# Altium PCB SignalBufferBoard.PcbDoc
Units mil, origin at the board's own origin, x right, y up, seen from the top; angles counter-clockwise.
Board outline 890 x 520 mil, 2 copper layers (Top Layer, Bottom Layer); 19 components, 26 nets, 80 pads, 10 vias.
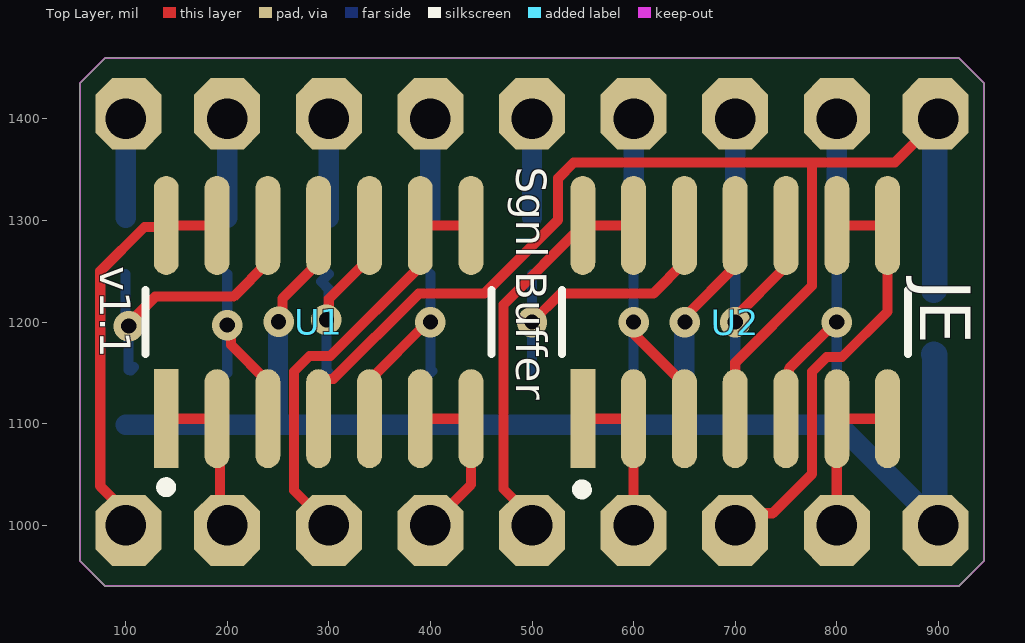
[diagram p0: Top Layer view]
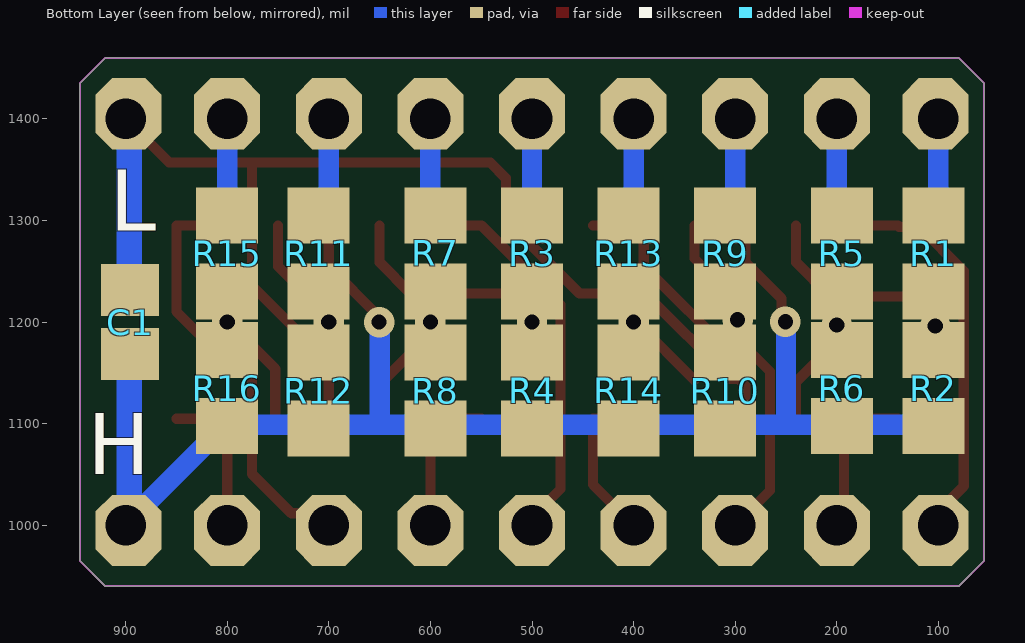
[diagram p1: Bottom Layer view, seen from below]

## Layer stack, top to bottom
Top Solder: solder mask 0.4, Solder Resist, Dk 3.5
Top Layer: signal copper 1.4
Dielectric 1: dielectric 12.6, FR-4, Dk 4.8
Bottom Layer: signal copper 1.4
Bottom Solder: solder mask 0.4, Solder Resist, Dk 3.5

## Board outline
945,965 920,940 80,940 55,965 55,1435 80,1460 920,1460 945,1435

## Design rules (kind name [scope] priority, off if disabled: settings)
BoardOutlineClearance [All] p1: gap=15 ignorepadtopadclearanceinfootprint=FALSE
Clearance [All] p1: gap=10 ignorepadtopadclearanceinfootprint=FALSE except(0: Arc-Hole Track-Hole SMDPad-Hole THPad-Hole Via-Hole Fill-Hole Poly-Hole Region-Hole Text-Hole; 7: Arc-SMDPad Track-SMDPad; 8: Arc-Arc Arc-Track Arc-THPad Arc-Via Arc-Fill Arc-Poly Arc-Region Arc-Text Track-Track Track-THPad Track-Via Track-Fill Track-Poly Track-Region Track-Text)
HoleSize [All] p1: absolutevalues=TRUE maxlimit=100 minlimit=10 maxpercent=80.000 minpercent=20.000
PolygonConnect [All] p1: connectstyle=Relief reliefconductorwidth=10 reliefentries=4 polygonreliefangle="90 Angle" airgapwidth=10
RoomDefinition SignalBufferBoard [InComponentClass('SignalBufferBoard')] p1: confinementstyle=ConfineIn formatcopy=TRUE lockcomponents=FALSE outline 50,1425 75,1450 925,1450 950,1425 950,975 925,950 75,950 50,975
RoutingVias [All] p1: holewidth=15 width=30 viastyle="Through Hole" minholewidth=12 minwidth=25 maxholewidth=28 maxwidth=50
SolderMaskExpansion [All] p1: expansion=4 istentingtop=FALSE
Width [All] p1: maxlimit=100 minlimit=8 preferedwidth=10 minimp=50.000000 maximp=50.000000 favimp=50.000000
29 further rules are at their usual default settings.

## Components (designator, comment, footprint, x,y, rotation, side; value= is the part's Value field where it differs from the comment)
C1 "C0805C105K4PACTU" CAPC2013X145X50NL20T25 895.5,1199.89 r90 bottom
R1 "ERA6AEB104V" RESC2013X60X40ML20T25 105,1267.4 r90 bottom
R2 "ERA6AEB204V" RESC2013X60X40ML20T25 105,1135 r90 bottom
R3 "ERA6AEB104V" RESC2013X60X40ML20T25 500,1267.6 r90 bottom
R4 "ERA6AEB204V" RESC2013X60X40ML20T25 500,1132.6 r90 bottom
R5 "ERA6AEB104V" RESC2013X60X40ML20T25 195,1267.4 r90 bottom
R6 "ERA6AEB204V" RESC2013X60X40ML20T25 195,1135 r90 bottom
R7 "ERA6AEB104V" RESC2013X60X40ML20T25 595,1267.6 r90 bottom
R8 "ERA6AEB204V" RESC2013X60X40ML20T25 595,1132.6 r90 bottom
R9 "ERA6AEB104V" RESC2013X60X40ML20T25 310,1267.6 r90 bottom
R10 "ERA6AEB204V" RESC2013X60X40ML20T25 310,1132.6 r90 bottom
R11 "ERA6AEB104V" RESC2013X60X40ML20T25 710,1267.4 r90 bottom
R12 "ERA6AEB204V" RESC2013X60X40ML20T25 710,1132.6 r90 bottom
R13 "ERA6AEB104V" RESC2013X60X40ML20T25 405,1267.6 r90 bottom
R14 "ERA6AEB204V" RESC2013X60X40ML20T25 405,1132.6 r90 bottom
R15 "ERA6AEB104V" RESC2013X60X40ML20T25 800,1267.4 r90 bottom
R16 "ERA6AEB204V" RESC2013X60X40ML20T25 800,1135 r90 bottom
U1 "LM324DT" FP-SO-14-IPC_A 290,1200 r90 top
U2 "LM324DT" FP-SO-14-IPC_A 700,1200 r90 top

## Footprints (in the part's own frame and the unit in brackets; to place one, negate y for a bottom-side part, rotate by r counter-clockwise, add the part's x,y. Pads: shape width x height; smd on the part's side, far side on the other; paste and mask are expansions set on the pad)
CAPC2013X145X50NL20T25 [mm] "Chip Capacitor, 2-Leads, Body 2.00x1.25mm, IPC Medium Density"
  rect 1.3x1.45 smd: 1(-0.8,0) 2(0.8,0)
  body extent -1.1,-0.72 1.1,0.72, height 1.45
FP-SO-14-IPC_A [mil]
  rect 97.4x24.54 smd paste+0 mask+0: 1(-95.12,150)
  rrect100% 97.4x24.54 smd paste+0 mask+0: 2(-95.12,100) 3(-95.12,50) 4(-95.12,0) 5(-95.12,-50) 6(-95.12,-100) 7(-95.12,-150) 8(95.12,-150) 9(95.12,-100) 10(95.12,-50) 11(95.12,0) 12(95.12,50) 13(95.12,100) 14(95.12,150)
  silkscreen extent -167,-170 32,170, body extent -164,-190 164,190, height 10
RESC2013X60X40ML20T25 [mm] "Chip Resistor, 2-Leads, Body 2.00x1.25mm, IPC Low Density"
  rect 1.4x1.55 smd: 1(-0.95,0) 2(0.95,0)
  body extent -1.1,-0.72 1.1,0.72, height 0.6

## Part data
C1: library part CMP-1036-04746-2, Manufacturer=Kemet, Part Number=C0805C105K4PACTU
R1 R3 R5 R7 R9 R11 R13 R15: library part CMP-2001-00583-1, Manufacturer=Panasonic, Part Number=ERA6AEB104V
R2 R4 R6 R8 R10 R12 R14 R16: library part CMP-2001-00611-1, Manufacturer=Panasonic, Part Number=ERA6AEB204V
U1 U2: library part CMP-12131-000005-1, "IC OPAMP GP 4 CIRCUIT 14SO", Input Bias Current=0.02uA, Input Offset Voltage=2mV, Manufacturer=STMicroelectronics, Max Dual Supply Voltage=15V, Max Junction Temp=+150°C, Max Supply Voltage=30V, Min Dual Supply Voltage=1.5V, Min Supply Voltage=3V, Nominal Supply Current=0.7-1.5mA, Output Current Per Channel=20-50mA, Package=SO-14, Temperature="0°C to +70°C", Temperature Range High=+70°C, Temperature Range Low=0°C, Voltage Gain=100dB, Automotive=No, Bandwidth=1.3MHz, Category=IC, ComponentLink2Description=Datasheet, ComponentLink2URL=https://www.st.com/content/ccc/resource/technical/document/datasheet/bd/fc/46/43/26/8f/40/7f/CD00001046.pdf/files/CD00001046.pdf/jcr:content/translations/en.CD00001046.pdf, Device Class L1="Integrated Circuits (ICs)", Device Class L2="Linear ICs", Device Class L3="Amplifiers - Op Amps", Digikey Description="IC OPAMP GP 4 CIRCUIT 14SO", Footprint Url=https://www.st.com/content/ccc/resource/technical/document/datasheet/group3/10/8a/e6/12/f8/e8/49/ce/DM00366438/files/DM00366438.pdf/jcr:content/translations/en.DM00366438.pdf, Gain Bandwidth=1.3MHz, Height=1.75mm, Lead Free=Yes, Manufacturer Part Number=LM324DT, Mouser Description="LM324 Series 32 V 1.3 MHz Low Power Quad Operational Amplifier - SOIC-14", Number Of Channels=4, Octopart=https://octopart.com/lm324dt-stmicroelectronics-39579146, RoHS=TRUE, Standoff Height=0.1mm

## Free pads (board coordinates)
  oct 65x70 hole 40 copper offset 3,5: 25(100,1400)
  oct 65x70 hole 40 copper offset 0,5: 26(200,1400) 27(300,1400) 28(400,1400) 29(500,1400) 30(600,1400) 31(700,1400) 32(800,1400)
  oct 65x70 hole 40 copper offset 0,-5: 33(800,1000) 34(700,1000) 35(600,1000) 36(500,1000) 37(400,1000) 38(300,1000) 39(200,1000)
  oct 65x70 hole 40 copper offset -3,5: 41(900,1400)
  oct 65x70 hole 40 copper offset -3,-5: 42(900,1000)
  oct 65x70 hole 40 copper offset 3,-5: O1(100,1000)

## Via types
v1: diameter 30, hole 15, Top Layer to Bottom Layer, tented top, 8 vias
v2: diameter 30, hole 15, Top Layer to Bottom Layer, tented both sides, 2 vias

## Nets (pads, with @x,y where several pads share a name; then routed paths per layer and width w, separated by ;. In a path a pad name is that pad's centre, name@x,y a point inside that pad or via, vN(x,y) a via of type N, cw(c..) or ccw(c..) an arc to the next point about the centre after c; other vN are vias at no path point)
A1: pad.25 R1.2 | length 97.4
  Bottom Layer w20: R1.2@100,1302.56 pad.25
A2: pad.26 R5.2 | length 97.4
  Bottom Layer w20: R5.2@200,1302.56 pad.26
A3: pad.27 R9.2 | length 97.4
  Bottom Layer w20: R9.2@300,1302.56 pad.27
A4: pad.28 R13.2 | length 97.4
  Bottom Layer w20: R13.2@400,1302.56 pad.28
A5: pad.29 R3.2 | length 97.4
  Bottom Layer w20: R3.2@500,1302.56 pad.29
A6: pad.30 R7.2 | length 94.9
  Bottom Layer w20: R7.2@600,1305.12 pad.30
A7: pad.31 R11.2 | length 94.9
  Bottom Layer w20: R11.2@700,1305.12 pad.31
A8: pad.32 R15.2 | length 94.9
  Bottom Layer w20: R15.2@800,1305.12 pad.32
GND: C1.1 pad.42 R2.1 R4.1 R6.1 R8.1 R10.1 R12.1 R14.1 R16.1 U1.11 U2.11 | length 1439.2
  Top Layer w10: v2(250.51,1200.37) 254.34,1204.2 254.34,1223.02 290,1258.69 U1.11 ; v2(650.51,1200) 650.51,1205.27 700,1254.75 U2.11
  Bottom Layer w10: v2@250,1199.86 v2(250.51,1200.37) ; v2@650,1199.49 v2(650.51,1200) ; R16.1@800,1098.82 R16.1@801.97,1098.82 ; pad.42 pad.42@900,1000.79
  Bottom Layer w20: R2.1@100,1098.82 250,1098.82 ; v2@250,1199.86 250,1098.82 ; R8.1@597.64,1098.82 250,1098.82 ; R8.1@600,1098.82 650,1098.82 ; v2@650,1199.49 650,1098.82 ; R16.1@800,1098.82 650,1098.82 ; R16.1@801.97,1098.82 896.25,1004.53 pad.42@900,1000.79
  Bottom Layer w25: C1.1 896.25,1167.65 896.25,1004.53 896.25,1003.75 pad.42
I2A: R7.1 R8.2 U2.3 | length 215.8
  Top Layer w10: v1(600,1200) 600,1188.64 650,1138.64 U2.3
  Bottom Layer w10: R8.2@600,1150 R7.1@600,1250
I2B: R15.1 R16.2 U2.5 | length 216.5
  Top Layer w10: U2.5 752.78,1107.66 752.78,1153.87 798.91,1200 v1(800,1200)
  Bottom Layer w10: R16.2@800,1150 v1(800,1200) R15.1@800,1250
I2C: R11.1 R12.2 U2.10 | length 215.8
  Top Layer w10: v1(700,1200) 700,1204.75 750,1254.75 U2.10
  Bottom Layer w10: R12.2@700,1150 v1(700,1200) R11.1@700,1250
I2D: R3.1 R4.2 U2.12 | length 308.2
  Top Layer w10: v1(500,1200) 528,1228 619.31,1228 650,1258.69 U2.12
  Bottom Layer w10: R4.2@500,1150 v1(500,1200) R3.1@500,1247.44
Ia: R5.1 R6.2 U1.3 | length 206.1
  Top Layer w10: v1(200,1197) 203.83,1193.17 203.83,1177.48 240,1141.31 U1.3
  Bottom Layer w10: R6.2@200,1150 200,1198.72 R5.1@200,1247.44
Ib: R13.1 R14.2 U1.5 | length 195.4
  Top Layer w10: U1.5@339.98,1142.77 397.22,1200 v1(400,1200)
  Bottom Layer w10: R14.2@400,1150 401.88,1151.88 400,1153.76 v1(400,1200) ; R14.2@400,1187.28 400,1198.72 R13.1@400,1247.44
Ic: R9.1 R10.2 U1.10 | length 217.2
  Top Layer w10: v1(297.67,1202.33) 300,1204.65 300,1222.62 328.79,1251.42 340,1262.62 U1.10
  Bottom Layer w10: v1(297.67,1202.33) 297.67,1201.92 297.62,1201.87 297.62,1152.38 R10.2@300,1150 ; v1@299.66,1200.34 299.66,1231.99 300,1232.33 292.45,1239.89 R9.1@300,1247.44
Id: R1.1 R2.2 U1.12 | length 299.8
  Top Layer w10: v1(103,1196) 103,1198.96 129.04,1225 206.31,1225 240,1258.69 U1.12
  Bottom Layer w10: R2.2@100,1196 R1.1@100,1247.44 ; R2.2@103,1153 103,1155.6 v1(103,1196) ; R2.2@105,1152.6 R2.2@108,1155.6
O1: pad.O1 U1.13 U1.14 | length 394
  Top Layer w10: pad.O1 100,1013.53 75,1038.53 75,1250 118.59,1293.59 138.47,1293.59 U1.14 U1.13
O2: pad.39 U1.1 U1.2 | length 159
  Top Layer w10: U1.1 U1.2 192.78,1102.1 192.78,1007.22 pad.39
O3: pad.38 U1.8 U1.9 | length 422.8
  Top Layer w10: pad.38 265.73,1034.27 265.73,1151.36 280.95,1166.58 301.53,1166.58 390,1255.05 U1.9 U1.8
O4: pad.37 U1.6 U1.7 | length 205.7
  Top Layer w10: U1.6@396.72,1073.45 390,1080.17 U1.6 U1.7 440,1040 pad.37
O5: pad.36 U2.13 U2.14 | length 389
  Top Layer w10: pad.36 500,1007.64 472,1035.64 472,1217.12 U2.14 U2.13
O6: pad.35 U2.1 U2.2 | length 154.9
  Top Layer w10: U2.1 U2.2 pad.35
O7: pad.34 U2.8 U2.9 | length 430.8
  Top Layer w10: pad.34 711.86,1011.86 736.86,1011.86 775.73,1050.73 775.73,1151.36 789.95,1165.58 805.18,1165.58 850,1210.4 U2.8 U2.9
O8: pad.33 U2.6 U2.7 | length 154.9
  Top Layer w10: pad.33 U2.6 U2.7
VCC: C1.2 pad.41 U1.4 U2.4 | length 1208.3
  Top Layer w10: U1.4 290,1137.38 296.72,1144.09 304.5,1144.09 388.4,1228 453,1228 525.73,1300.73 525.73,1341.6 541.12,1357 775.55,1357 857,1357 pad.41 ; U2.4@700,1125 700,1160 775.64,1235.64 775.64,1356.13 775.55,1356.22
  Bottom Layer w25: C1.2 896.25,1232.14 896.25,1396.25 pad.41

## Keep-outs
Keep-Out Layer:
  the board outline again, w2

## Silkscreen, mask and mechanical layers (free items; w line width, h text height)
Top Overlay:
  text "Sgnl Buffer" at 484.61,1352.82 h30 r270
  text "v1.1" at 75,1255 h30 r270
  text "JE" at 882,1241.65 h50 r270
Bottom Overlay:
  text "L" at 915.5,1290 h60
  text "H" at 875.51,1050 h60